# Altium PCB 3.PcbDoc (part 1 of 2)
Units mm, origin at the board's own origin, x right, y up, seen from the top; angles counter-clockwise.
Board outline 213.29 x 128.2 mm, 2 copper layers (Top Layer, Bottom Layer); 207 components, 133 nets, 588 pads, 301 vias.
Unrouted connection lines stored in the file: 3.
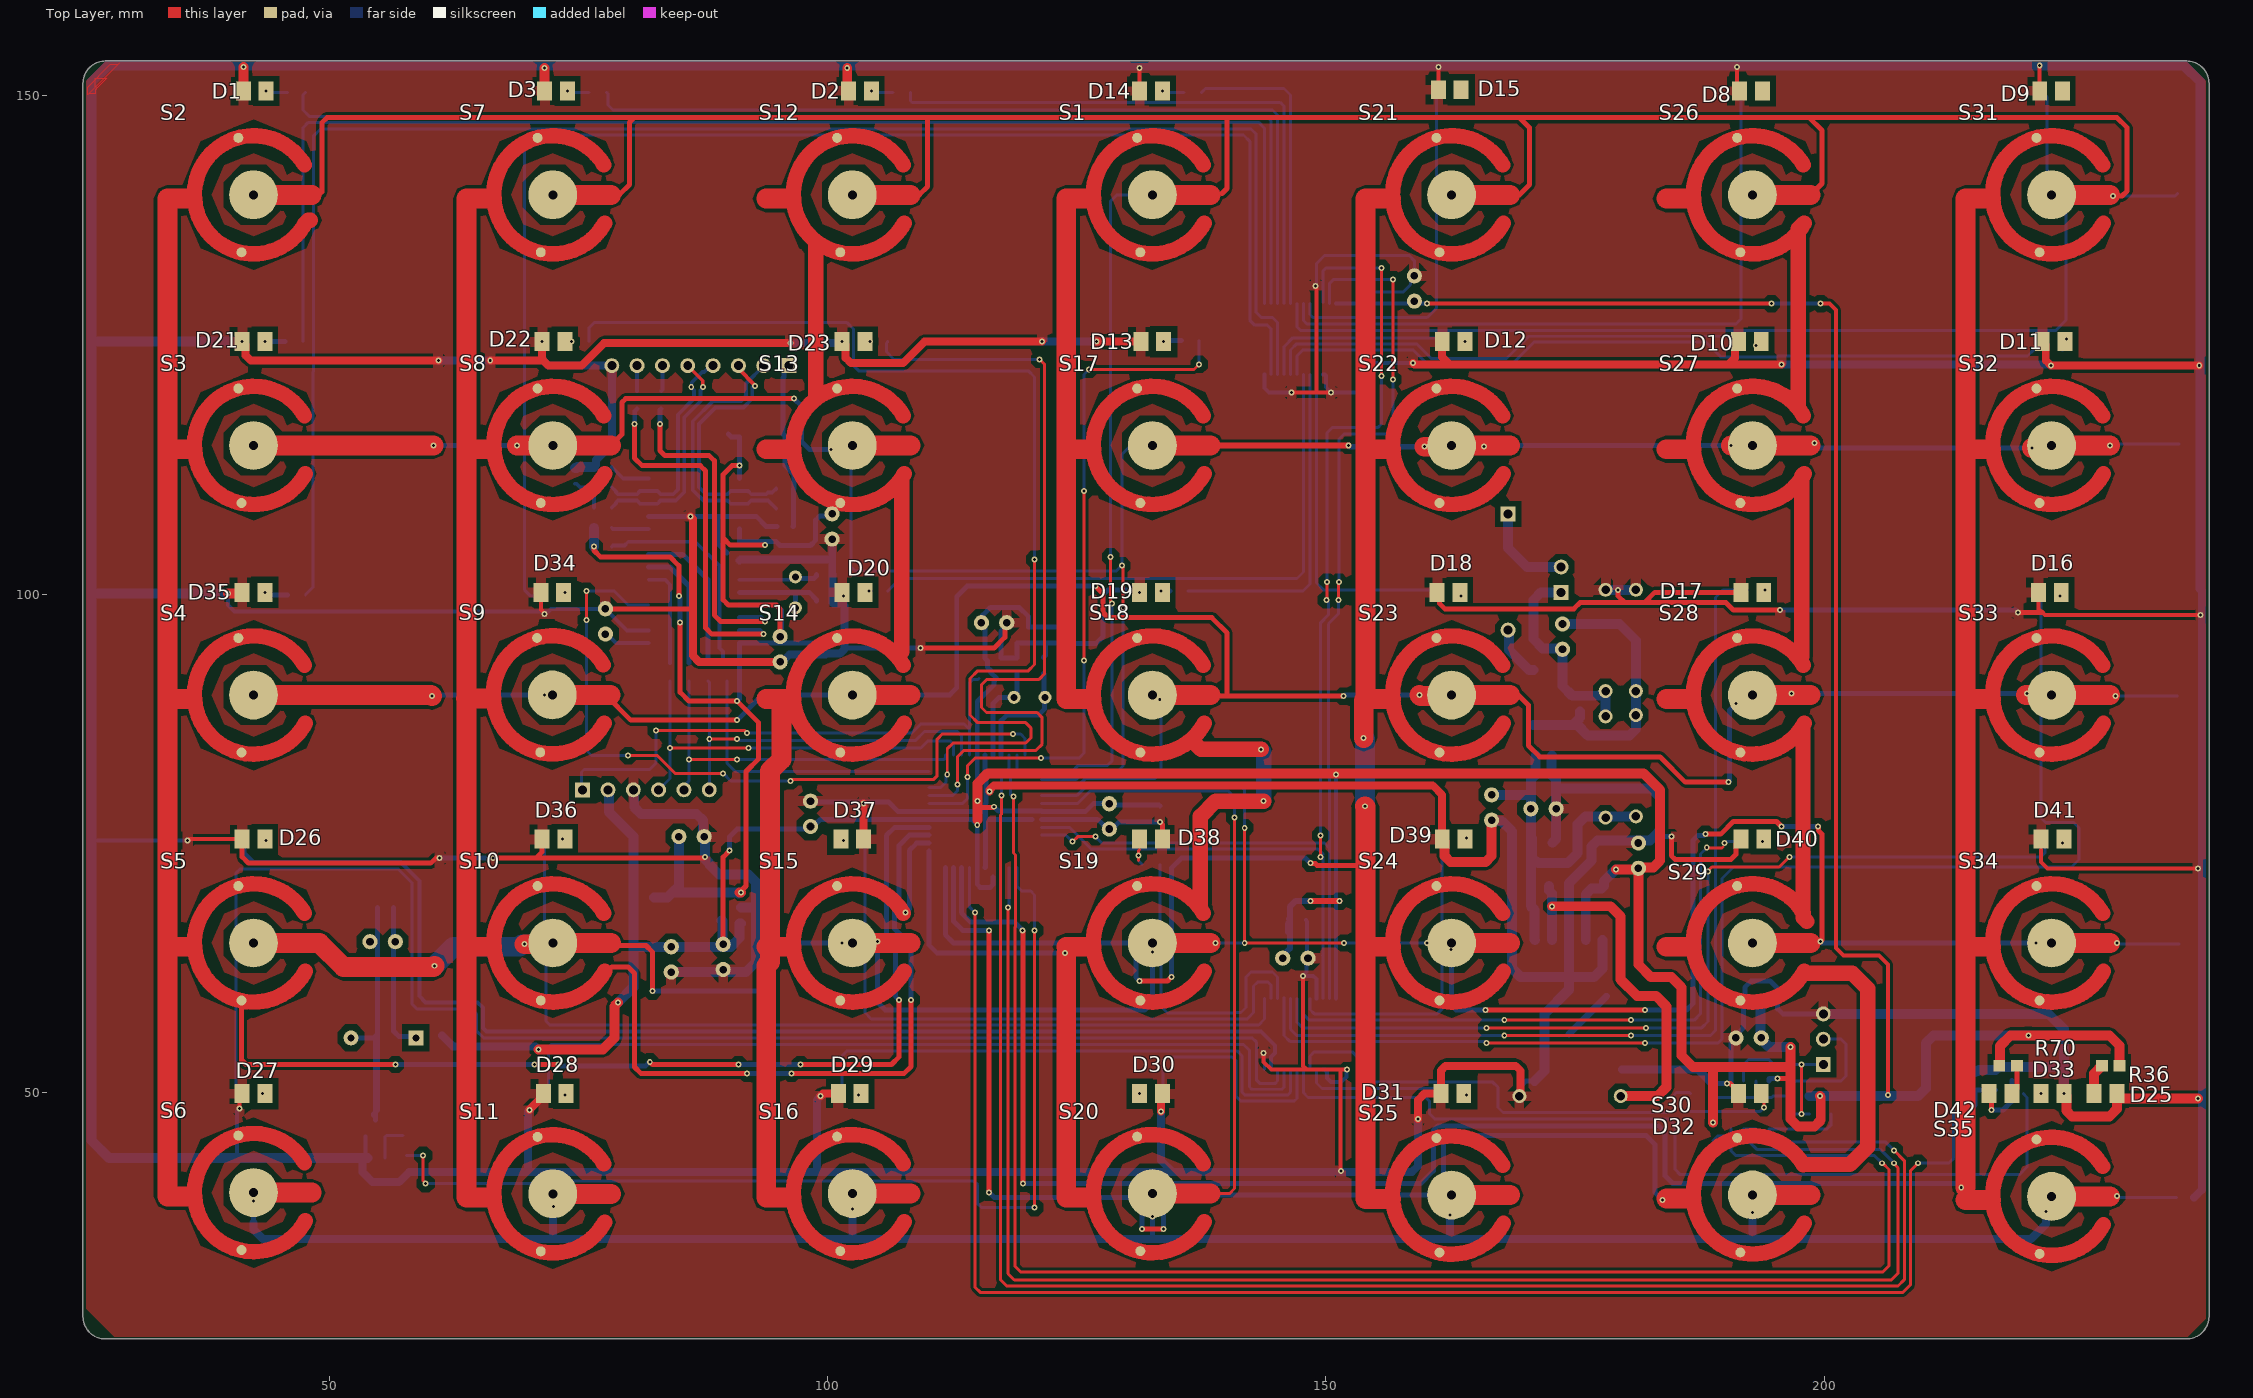
[diagram p0: Top Layer view]
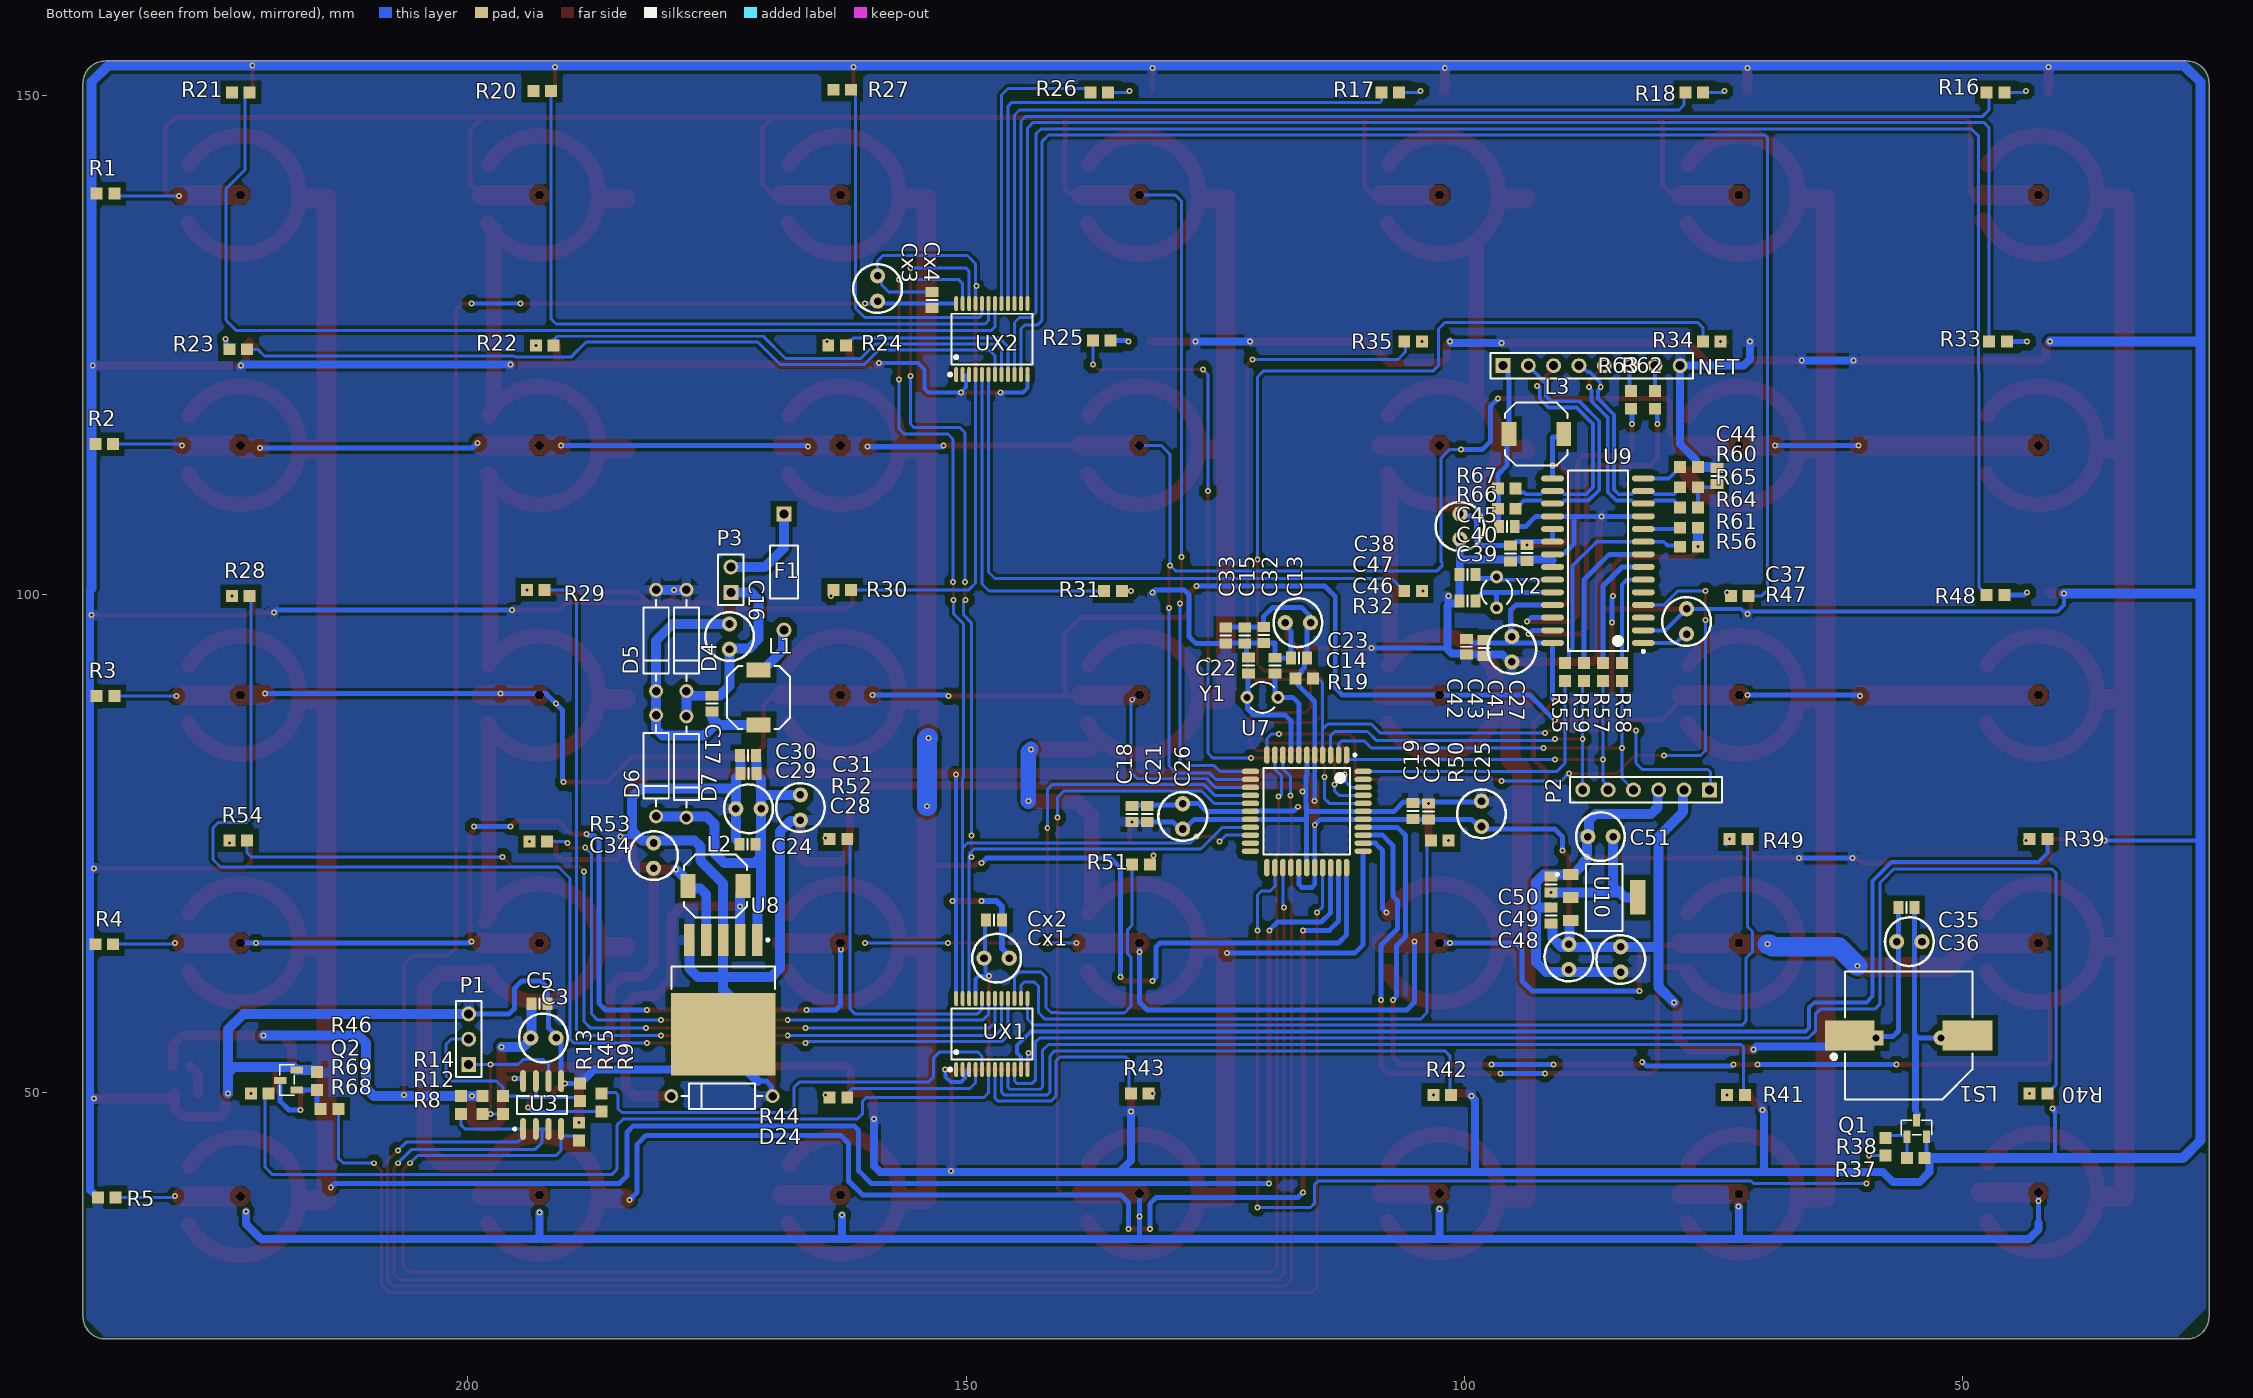
[diagram p1: Bottom Layer view, seen from below]

## Layer stack, top to bottom
Top Solder: solder mask 0.0102, Solder Resist, Dk 3.5
Top Layer: signal copper 0.0356
Dielectric 1: dielectric 0.32, FR-4, Dk 4.8
Bottom Layer: signal copper 0.0356
Bottom Solder: solder mask 0.0102, Solder Resist, Dk 3.5

## Board outline
27.534,25.306 cw(c27.534,27.534) 25.306,27.534 25.306,151.264 cw(c27.552,151.264) 27.552,153.51 236.354,153.51 cw(c236.354,151.264) 238.6,151.264 238.6,27.552 cw(c236.354,27.552) 236.354,25.306

## Design rules (kind name [scope] priority, off if disabled: settings)
Clearance [All] p1: gap=0.6 ignorepadtopadclearanceinfootprint=FALSE except(0: Arc-Hole Track-Hole SMDPad-Hole THPad-Hole Via-Hole Fill-Hole Poly-Hole Region-Hole Text-Hole; 0.1: SMDPad-Text THPad-Text Via-Text Fill-Text Poly-Text Region-Text Text-Text; 0.3: Arc-Arc Arc-Track Arc-SMDPad Arc-THPad Arc-Via Arc-Fill Arc-Poly Arc-Region Arc-Text Track-Track Track-SMDPad Track-THPad Track-Via Track-Fill Track-Poly Track-Region Track-Text)
ComponentClearance [All] p1: gap=0 collisioncheckmode=3 verticalgap=0 showdistances=FALSE
DiffPairsRouting [All] p1: maxlimit=0.254 minlimit=0.254 mostfreqgap=0.254 toplayer_minwidth=0.381 toplayer_maxwidth=0.381 toplayer_prefwidth=0.381 bottomlayer_minwidth=0.381 bottomlayer_maxwidth=0.381 bottomlayer_prefwidth=0.381 maxuncoupledlength=12.7
PlaneClearance [All] p1: clearance=0.1
PlaneConnect [All] p1: planeconnectstyle=Relief reliefexpansion=0.508 reliefentries=4 reliefconductorwidth=0.5 reliefairgap=0.5
PolygonConnect [All] p1: connectstyle=Relief reliefconductorwidth=1 reliefentries=4 polygonreliefangle="90 Angle" airgapwidth=0.5
RoutingVias [All] p1: holewidth=0.3 width=0.6 viastyle="Through Hole" minholewidth=0.3 minwidth=0.6 maxholewidth=0.3 maxwidth=0.6
SolderMaskExpansion [All] p1: expansion=0.102 istentingtop=FALSE
Width [All] p1: maxlimit=10 minlimit=0.254 preferedwidth=0.254 minimp=50.000000 maximp=50.000000 favimp=50.000000
26 further rules are at their usual default settings.

## Classes and differential pairs
component class pic: C3 C5 C13 C14 C15 C16 C17 C18 C19 C20 C21 C22 C23 C24 C25 C26 C27 C28 C29 C30 C31 C32 C33 C34 C35 C36 Cx1 Cx2 Cx3 Cx4 D1 D2 D3 D4 D5 D6 D7 D8 D9 D10 D11 D12 D13 D14 D15 D16 D17 D18 D19 D20 D21 D22 D23 D24 D25 D26 D27 D28 D29 D30 D31 D32 D33 D34 D35 D36 D37 D38 D39 D40 D41 F1 L1 L2 LS1 P1 P2 P3 Q1 R1 R2 R3 R4 R5 R8 R9 R12 R13 R14 R16 R17 R18 R19 R20 R21 R22 R23 R24 R25 R26 R27 R28 R29 R30 R31 R32 R33 R34 R35 R36 R37 R38 R39 R40 R41 R42 R43 R44 R45 R46 R47 R48 R49 R50 R51 R52 R53 R54 S1 S2 S3 S4 S5 S6 S7 S8 S9 S10 S11 S12 S13 S14 S15 S16 S17 S18 S19 S20 S21 S22 S23 S24 S25 S26 S27 S28 S29 S30 S31 S32 S33 S34 S35 U3 U7 U8 UX1 UX2 Y1
component class ENC28J60: C37 C38 C39 C40 C41 C42 C43 C44 C45 C46 C47 C48 C49 C50 C51 D42 L3 NET Q2 R55 R56 R57 R58 R59 R60 R61 R62 R63 R64 R65 R66 R67 R68 R69 R70 U9 U10 Y2
differential pair TPO: +TPO_P -TPO_N
differential pair TPI: +TPI_P -TPI_N

## Components (designator, comment, footprint, x,y, rotation, side; value= is the part's Value field where it differs from the comment)
C3 "Cap Pol2" cap_ele 193.675,55.499 r180 bottom value=10uF
C5 "Cap" 6-0805_L 192.786,58.928 r180 bottom value=0.1uF
C13 "Cap Pol2" cap_ele 115.443,97.155 r0 bottom value=10uF
C14 "Cap" 6-0805_L 116.586,93.599 r180 bottom value=0.1uF
C15 "Cap" 6-0805_L 122.047,95.885 r90 bottom value=0.1uF
C16 "Cap Pol2" cap_ele 173.736,97.028 r270 bottom value=10uF
C17 "Cap" 6-0805_L 175.514,89.027 r90 bottom value=0.1uF
C18 "Cap" 6-0805_L 133.35,77.978 r90 bottom value=0.1uF
C19 "Cap" 6-0805_L 105.156,78.27 r270 bottom value=0.1uF
C20 "Cap" 6-0805_L 103.632,78.232 r270 bottom value=0.1uF
C21 "Cap" 6-0805_L 131.826,77.978 r90 bottom value=0.1uF
C22 "Cap" 6-0805_L 121.666,92.875 r270 bottom value=22pF
C23 "Cap" 6-0805_L 118.999,92.837 r270 bottom value=22pF
C24 "Cap" 6-0805_L 171.92,74.93 r0 bottom value=0.1uF
C25 "Cap Pol2" cap_ele 98.298,76.708 r90 bottom value=10uF
C26 "Cap Pol2" cap_ele 128.27,78.994 r270 bottom value=10uF
C27 "Cap Pol2" cap_ele 84.328,64.643 r270 bottom value=10uF
C28 "Cap Pol2" cap_ele 166.624,79.883 r270 bottom value=10uF
C29 "Cap" 6-0805_L 171.831,82.042 r0 bottom value=0.1uF
C30 "Cap" 6-0805_L 171.869,83.82 r0 bottom value=0.1uF
C31 "Cap Pol2" cap_ele 170.561,78.486 r0 bottom value=10uF
C32 "Cap" 6-0805_L 120.142,95.923 r270 bottom value=0.1uF
C33 "Cap" 6-0805_L 123.952,95.885 r270 bottom value=0.1uF
C34 "Cap Pol2" cap_ele 181.356,72.517 r90 bottom value=10uF
C35 "Cap" 6-0805_L 55.664,68.58 r180 bottom value=0.1uF
C36 "Cap Pol2" cap_ele 56.642,65.151 r180 bottom value=10uF
C37 "Cap Pol2" cap_ele 77.724,96.012 r90 bottom value=10uF
C38 "Cap Pol2" cap_ele 100.457,108.077 r270 bottom value=10uF
C39 "Cap" 6-0805_L 95.377,104.102 r90 bottom value=0.1uF
C40 "Cap" 6-0805_L 93.726,104.14 r90 bottom value=0.1uF
C41 "Cap" 6-0805_L 98.044,94.615 r90 bottom value=0.1uF
C42 "Cap Pol2" cap_ele 95.25,95.758 r270 bottom value=10uF
C43 "Cap" 6-0805_L 99.822,94.742 r90 bottom value=0.1uF
C44 "Cap" 6-0805_L 74.676,111.887 r270 bottom value=100nF
C45 "Cap" 6-0805_L 95.758,106.807 r0 bottom value=100nF
C46 "Cap" 6-0805_L 99.695,101.981 r180 bottom value=18pF
C47 "Cap" 6-0805_L 99.695,99.314 r180 bottom value=18pF
C48 "Cap Pol2" cap_ele 89.535,64.897 r270 bottom value=10uF
C49 "Cap" 6-0805_L 91.313,67.78 r90 bottom value=0.1uF
C50 "Cap" 6-0805_L 91.313,70.904 r90 bottom value=0.1uF
C51 "Cap Pol2" cap_ele 85.09,75.692 r0 bottom value=10uF
Cx1 "Cap Pol2" cap_ele 145.669,63.5 r0 bottom value=10uF
Cx2 "Cap" 6-0805_L 147.193,67.31 r180 bottom value=0.1uF
Cx3 "Cap Pol2" cap_ele 158.877,129.413 r90 bottom value=10uF
Cx4 "Cap" 6-0805_L 153.416,129.54 r270 bottom value=0.1uF
D1 "LED0" led 42.545,150.495 r180 top
D2 "LED0" led 103.251,150.495 r180 top
D3 "LED0" led 72.771,150.495 r180 top
D4 "Diode" DIODE-0.4 178.054,95.377 r270 bottom
D5 "Diode" DIODE-0.4 181.102,95.377 r270 bottom
D6 "Diode" DIODE-0.4 181.102,82.804 r270 bottom
D7 "Diode" DIODE-0.4 178.054,82.677 r270 bottom
D8 "LED0" LED 192.659,150.495 r180 top
D9 "LED0" led 222.758,150.495 r180 top
D10 "LED0" led 192.532,125.349 r180 top
D11 "LED0" led 223.012,125.349 r180 top
D12 "LED0" led 162.814,125.349 r180 top
D13 "LED0" led 132.588,125.349 r180 top
D14 "LED0" led 132.461,150.495 r180 top
D15 "LED0" led 162.433,150.622 r180 top
D16 "LED0" led 222.631,100.203 r180 top
D17 "LED0" led 192.786,100.203 r180 top
D18 "LED0" led 162.306,100.203 r180 top
D19 "LED0" led 132.461,100.203 r180 top
D20 "LED0" led 102.616,100.203 r180 top
D21 "LED0" led 42.418,125.349 r180 top
D22 "LED0" led 72.517,125.349 r180 top
D23 "LED0" led 102.616,125.349 r180 top
D24 "Diode" DIODE-0.4 174.498,49.657 r0 bottom
D25 "LED0" led 228.219,49.911 r0 top
D26 "LED0" led 42.418,75.438 r0 top
D27 "LED0" led 42.418,49.911 r0 top
D28 "LED0" led 72.644,49.911 r0 top
D29 "LED0" led 102.235,49.911 r0 top
D30 "LED0" led 132.461,49.911 r180 top
D31 "LED0" led 162.687,49.911 r0 top
D32 "LED0" led 192.532,49.911 r0 top
D33 "LED0" led 222.885,49.911 r180 top
D34 "LED0" led 72.39,100.203 r0 top
D35 "LED0" led 42.418,100.203 r0 top
D36 "LED0" led 72.517,75.438 r0 top
D37 "LED0" led 102.489,75.438 r180 top
D38 "LED0" led 132.461,75.438 r180 top
D39 "LED0" led 162.814,75.438 r0 top
D40 "LED0" led 192.786,75.438 r0 top
D41 "LED0" led 222.885,75.438 r0 top
D42 "LED0" led 217.678,49.911 r180 top
F1 "Fuse 1" PIN-W2/E2.8 168.275,102.235 r270 bottom
L1 "B82462G4224M000" B82462G4 170.815,89.662 r270 bottom value=470uH
L2 "B82462G4224M000" B82462G4 175.133,70.739 r0 bottom value=470uH
L3 "B82462G4224M000" B82462G4 92.793,116.078 r180 bottom value=50uH
LS1 "Buzzer" ABSM-1574 61.347,55.739 r180 bottom
NET "Header 8" HDR1X8 96.139,122.936 r180 bottom
P1 "Header 3" HDR1X3 199.898,52.832 r90 bottom
P2 "Header 6" HDR1X6 75.438,80.391 r0 bottom
P3 "Header 2" HDR1X2 173.609,100.203 r90 bottom
Q1 "NPN" NPN(SOP) 54.737,46.387 r180 bottom
Q2 "NPN" NPN(SOP) 217.964,51.181 r90 bottom
R1 "Res1" res 236.347,140.208 r180 bottom value=1K
R2 "Res1" res 236.474,115.062 r180 bottom value=1K
R3 "Res1" res 236.347,89.789 r180 bottom value=1K
R4 "Res1" res 236.474,64.897 r180 bottom value=1K
R5 "Res1" res 236.22,39.497 r180 bottom value=1K
R8 "Res1" res 200.66,48.768 r90 bottom value=10K
R9 "Res1" res 188.849,46.101 r270 bottom value=10K
R12 "Res1" res 198.501,48.768 r90 bottom value=10K
R13 "Res1" res 188.722,50.038 r270 bottom value=10K
R14 "Res1" res 196.469,48.768 r270 bottom value=270
R16 "Res1" res 46.736,150.368 r180 bottom value=1K
R17 "Res1" res 107.442,150.368 r180 bottom value=1K
R18 "Res1" res 76.962,150.368 r180 bottom value=1K
R19 "Res1" res 116.078,91.567 r180 bottom value=1K
R20 "Res1" res 192.532,150.495 r0 bottom value=1K
R21 "Res1" res 222.758,150.368 r0 bottom value=1K
R22 "Res1" res 192.278,124.968 r0 bottom value=1K
R23 "Res1" res 223.012,124.587 r0 bottom value=1K
R24 "Res1" res 162.941,124.968 r0 bottom value=1K
R25 "Res1" res 136.398,125.476 r180 bottom value=1K
R26 "Res1" res 136.652,150.368 r180 bottom value=1K
R27 "Res1" res 162.433,150.622 r0 bottom value=1K
R28 "Res1" res 222.758,99.822 r0 bottom value=1K
R29 "Res1" res 193.167,100.457 r0 bottom value=1K
R30 "Res1" res 162.433,100.457 r0 bottom value=1K
R31 "Res1" res 135.255,100.33 r180 bottom value=1K
R32 "Res1" res 105.156,100.33 r180 bottom value=1K
R33 "Res1" res 46.482,125.349 r180 bottom value=1K
R34 "Res1" res 75.184,125.349 r180 bottom value=1K
R35 "Res1" res 105.156,125.349 r180 bottom value=1K
R36 "Res1" res 228.727,52.705 r180 top value=1K
R37 "Res1" res 57.785,44.577 r90 bottom value=1K
R38 "Res1" res 54.737,43.434 r0 bottom value=1K
R39 "Res1" res 42.418,75.438 r180 bottom value=1K
R40 "Res1" res 42.418,49.911 r180 bottom value=1K
R41 "Res1" res 72.771,49.784 r180 bottom value=1K
R42 "Res1" res 102.235,49.784 r180 bottom value=1K
R43 "Res1" res 132.588,49.911 r0 bottom value=1K
R44 "Res1" res 162.814,49.53 r180 bottom value=1K
R45 "Res1" res 186.563,49.022 r90 bottom value=1K
R46 "Res1" res 220.853,49.911 r180 bottom value=1K
R47 "Res1" res 72.39,99.822 r180 bottom value=1K
R48 "Res1" res 46.736,99.949 r0 bottom value=1K
R49 "Res1" res 72.517,75.438 r180 bottom value=1K
R50 "Res1" res 102.489,75.311 r0 bottom value=1K
R51 "Res1" res 132.461,72.898 r0 bottom value=1K
R52 "Res1" res 162.814,75.438 r180 bottom value=1K
R53 "Res1" res 192.913,75.184 r180 bottom value=1K
R54 "Res1" res 223.012,75.311 r180 bottom value=1K
R55 "Res1" res 89.916,92.202 r270 bottom value=1K
R56 "Res1" res 77.47,104.775 r180 bottom value=1K
R57 "Res1" res 86.106,92.202 r270 bottom value=1K
R58 "Res1" res 84.201,92.202 r270 bottom value=1K
R59 "Res1" res 88.011,92.202 r270 bottom value=1K
R60 "Res1" res 77.47,112.776 r180 bottom value=1K
R61 "Res1" res 77.47,106.68 r180 bottom value=1K
R62 "Res1" res 80.899,119.507 r270 bottom value=1K
R63 "Res1" res 83.312,119.507 r270 bottom value=1K
R64 "Res1" res 77.47,108.712 r0 bottom value=50
R65 "Res1" res 77.47,110.744 r0 bottom value=1K
R66 "Res1" res 95.758,110.617 r180 bottom value=1K
R67 "Res1" res 95.758,108.585 r180 bottom value=1K
R68 "Res1" res 213.868,48.387 r0 bottom value=1K
R69 "Res1" res 215.138,51.181 r270 bottom value=1K
R70 "Res1" res 218.44,52.705 r180 top value=1K
S1 "SW-PB" button#1 132.665,140.227 r180 top
S2 "SW-PB" button#2 42.495,140.227 r180 top
S3 "SW-PB" button#1 42.495,115.081 r180 top
S4 "SW-PB" button#3 42.495,90.043 r180 top
S5 "SW-PB" button#4 42.495,65.17 r180 top
S6 "SW-PB" button#1 42.495,40.132 r180 top
S7 "SW-PB" button#1 72.517,140.227 r180 top
S8 "SW-PB" button#5 72.517,115.081 r180 top
S9 "SW-PB" button#6 72.467,90.062 r180 top
S10 "SW-PB" button#1 72.517,65.17 r180 top
S11 "SW-PB" button#7 72.517,40.005 r180 top
S12 "SW-PB" button#8 102.566,140.227 r180 top
S13 "SW-PB" button#9 102.566,115.081 r180 top
S14 "SW-PB" button#10 102.566,90.043 r180 top
S15 "SW-PB" button#11 102.566,65.17 r180 top
S16 "SW-PB" button#1 102.566,40.024 r180 top
S17 "SW-PB" button#1 132.665,115.081 r180 top
S18 "SW-PB" button#7 132.665,90.043 r180 top
S19 "SW-PB" button#1 132.665,65.17 r180 top
S20 "SW-PB" button#2 132.665,40.024 r180 top
S21 "SW-PB" button#1 162.687,140.227 r180 top
S22 "SW-PB" button#12 162.687,115.081 r180 top
S23 "SW-PB" button#1 162.687,90.043 r180 top
S24 "SW-PB" button#1 162.687,65.17 r180 top
S25 "SW-PB" button#7 162.687,39.878 r180 top
S26 "SW-PB" button#7 192.863,140.227 r180 top
S27 "SW-PB" button#8 192.863,115.081 r180 top
S28 "SW-PB" button#13 192.863,90.043 r180 top
S29 "SW-PB" button#7 192.863,65.17 r180 top
S30 "SW-PB" button#1 192.863,39.897 r180 top
S31 "SW-PB" button#1 222.885,140.227 r180 top
S32 "SW-PB" button#1 222.885,115.081 r180 top
S33 "SW-PB" button#1 222.885,90.043 r180 top
S34 "SW-PB" button#1 222.885,65.17 r180 top
S35 "SW-PB" button#1 222.885,39.751 r180 top
U3 "MAX485CSA" NSO8_N 192.532,48.768 r90 bottom
U7 "ATmega16-16AC" 44A_N 115.824,78.232 r270 bottom
U8 "LM2596S-5.0" TS5B_N 174.371,59.33 r270 bottom
U9 "ENC28J60/SO" SOIC-SO28_N 86.614,103.378 r0 bottom
U10 "REG1117-3.3" ZZ311 85.979,69.596 r270 bottom
UX1 "PCF8575" PCF8575 604.468,398.539 r180 bottom
UX2 "PCF8575" PCF8575 604.468,468.262 r180 bottom
Y1 "16MHz" R38 120.269,89.662 r90 bottom
Y2 "XTAL" R38 96.774,100.203 r0 bottom

## Footprints (in the part's own frame and the unit in brackets; to place one, negate y for a bottom-side part, rotate by r counter-clockwise, add the part's x,y. Pads: shape width x height; smd on the part's side, far side on the other; paste and mask are expansions set on the pad)
6-0805_L [mm] "Chip Resistor, Body 2.0x1.2mm, IPC High Density"
  rect 1x1.3 smd: 1(-0.8,0) 2(0.8,0)
  silkscreen extent 0,-0.55 0,0.55, body extent -1.07,-0.7 1.07,0.7, height 0.7
44A_N [mm] "Thin QFP, 44-Leads, Body 10x10mm, Pitch 0.8mm, IPC Medium Density"
  oval 1.75x0.55 smd: 1(-5.65,4) 2(-5.65,3.2) 3(-5.65,2.4) 4(-5.65,1.6) 5(-5.65,0.8) 6(-5.65,0) 7(-5.65,-0.8) 8(-5.65,-1.6) 9(-5.65,-2.4) 10(-5.65,-3.2) 11(-5.65,-4) 23(5.65,-4) 24(5.65,-3.2) 25(5.65,-2.4) 26(5.65,-1.6) 27(5.65,-0.8) 28(5.65,0) 29(5.65,0.8) 30(5.65,1.6) 31(5.65,2.4) 32(5.65,3.2) 33(5.65,4)
  oval 0.55x1.75 smd: 12(-4,-5.65) 13(-3.2,-5.65) 14(-2.4,-5.65) 15(-1.6,-5.65) 16(-0.8,-5.65) 17(0,-5.65) 18(0.8,-5.65) 19(1.6,-5.65) 20(2.4,-5.65) 21(3.2,-5.65) 22(4,-5.65) 34(4,5.65) 35(3.2,5.65) 36(2.4,5.65) 37(1.6,5.65) 38(0.8,5.65) 39(0,5.65) 40(-0.8,5.65) 41(-1.6,5.65) 42(-2.4,5.65) 43(-3.2,5.65) 44(-4,5.65)
  silkscreen extent -5.77,-4.35 4.35,4.95, body extent -5,-5 5,5, height 1.2
ABSM-1574 [mm] "Magnetic Transducer Buzzer"
  rect 5x3 smd: 1(0,0) 2(11.8,0)
  rect 1.5x1.5 hole 0.7: 1A(2.65,-0.24)
  round 1.5 hole 0.7: 2A(9.15,-0.24)
  silkscreen extent -1.83,-6.4 12.3,6.4
B82462G4 [mm] "SM Inductor; 2 Leads; Body 6.3x6.3mm (LxW)"
  rect 1.5x2.4 smd: 1(-2.75,0) 2(2.75,0)
  silkscreen extent -3.15,-3.15 3.15,3.15, body extent -3.15,-3.15 3.15,3.15, height 3
button#1 [mm]
  round 4.9 smd: 1(0.077,0.146)
  round 1 smd: 2(1.283,5.914) 2(1.601,-5.569)
  Top Layer lines w1.545: -5.038,-2.848 ccw(c0.077,0.146) -5.126,2.984
  Top Layer lines w2: 8.713,0.527 6.173,0.527 ; 0.077,0.146 -5.765,0.146
button#2 [mm]
  round 4.9 smd: 1(0.077,0.146)
  round 1 smd: 2(1.283,5.914) 2(1.601,-5.569)
  Top Layer lines w1.545: -5.038,-2.848 ccw(c0.077,0.146) -5.126,2.984
  Top Layer lines w2: 8.713,0.527 6.173,0.527 ; 0.077,0.146 -4.114,0.146 -5.765,0.146
button#3 [mm]
  round 4.9 smd: 1(0.077,0.146)
  round 1 smd: 2(1.283,5.914) 2(1.601,-5.569)
  Top Layer lines w1.545: -5.038,-2.848 ccw(c0.077,0.146) -5.126,2.984
  Top Layer lines w2: 8.713,0.527 6.173,0.527 ; 0.077,0.146 -0.812,0.146 -3.098,0.146 -5.765,0.146
button#4 [mm]
  round 4.9 smd: 1(0.077,0.146)
  round 1 smd: 2(1.283,5.914) 2(1.601,-5.569)
  Top Layer lines w1.545: -5.038,-2.848 ccw(c0.077,0.146) 1.239,5.958 ccw(c0.077,0.146) -5.126,2.984
  Top Layer lines w2: 8.713,0.527 6.173,0.527 ; 0.077,0.146 -4.368,0.146 -5.765,0.146
button#5 [mm]
  round 4.9 smd: 1(0.077,0.146)
  round 1 smd: 2(1.283,5.914) 2(1.601,-5.569)
  Top Layer lines w1.545: -5.038,-2.848 ccw(c0.077,0.146) -5.126,2.984
  Top Layer lines w2: 8.713,0.527 6.173,0.527 ; 0.077,0.146 -3.175,0.146 -4.699,0.146 -5.765,0.146
button#6 [mm]
  round 4.9 smd: 1(0.077,0.146)
  round 1 smd: 2(1.283,5.914) 2(1.601,-5.569)
  Top Layer lines w1.545: -5.038,-2.848 ccw(c0.077,0.146) -5.126,2.984
  Top Layer lines w2: 8.713,0.527 8.663,0.527 6.173,0.527 ; 0.077,0.146 -4.699,0.146 -5.257,0.146 -5.765,0.146
button#7 [mm]
  round 4.9 smd: 1(0.077,0.146)
  round 1 smd: 2(1.283,5.914) 2(1.601,-5.569)
  Top Layer lines w1.545: -5.038,-2.848 ccw(c0.077,0.146) -5.126,2.984
  Top Layer lines w2: 8.713,0.527 6.173,0.527 ; 0.077,0.146 0,0.146 -5.765,0.146
button#8 [mm]
  round 4.9 smd: 1(0.077,0.146)
  round 1 smd: 2(1.283,5.914) 2(1.601,-5.569)
  Top Layer lines w1.545: -5.038,-2.848 ccw(c0.077,0.146) 4.405,4.195 ccw(c0.077,0.146) 4.126,4.475 ccw(c0.077,0.146) -5.126,2.984
  Top Layer lines w2: 8.713,0.527 6.173,0.527 ; 0.077,0.146 -5.765,0.146
button#9 [mm]
  round 4.9 smd: 1(0.077,0.146)
  round 1 smd: 2(1.283,5.914) 2(1.601,-5.569)
  Top Layer lines w1.545: -5.038,-2.848 ccw(c0.077,0.146) 4.057,4.538 ccw(c0.077,0.146) -4.567,3.829 ccw(c0.077,0.146) -4.716,3.632 ccw(c0.077,0.146) -5.126,2.984
  Top Layer lines w2: 8.713,0.527 6.173,0.527 ; 0.077,0.146 -5.765,0.146
button#10 [mm]
  round 4.9 smd: 1(0.077,0.146)
  round 1 smd: 2(1.283,5.914) 2(1.601,-5.569)
  Top Layer lines w1.545: -5.038,-2.848 ccw(c0.077,0.146) -5.126,2.984
  Top Layer lines w2: 8.713,0.527 7.189,0.527 6.173,0.527 ; 0.077,0.146 -4.622,0.146 -5.765,0.146
button#11 [mm]
  round 4.9 smd: 1(0.077,0.146)
  round 1 smd: 2(1.283,5.914) 2(1.601,-5.569)
  Top Layer lines w1.545: -5.038,-2.848 ccw(c0.077,0.146) -5.126,2.984
  Top Layer lines w2: 8.713,0.527 8.332,0.527 6.173,0.527 ; 0.077,0.146 -2.463,0.146 -5.765,0.146
button#12 [mm]
  round 4.9 smd: 1(0.077,0.146)
  round 1 smd: 2(1.283,5.914) 2(1.601,-5.569)
  Top Layer lines w1.545: -5.038,-2.848 ccw(c0.077,0.146) -5.126,2.984
  Top Layer lines w2: 8.713,0.527 6.173,0.527 ; 0.077,0.146 -3.175,0.146 -5.765,0.146
button#13 [mm]
  round 4.9 smd: 1(0.077,0.146)
  round 1 smd: 2(1.283,5.914) 2(1.601,-5.569)
  Top Layer lines w1.545: -5.038,-2.848 ccw(c0.077,0.146) -5.126,2.984
  Top Layer lines w2: 8.713,0.527 6.173,0.527 ; 0.077,0.146 -1.193,0.146 -5.765,0.146
cap_ele [mil]
  round 60 hole 30: 1(0,0) 2(100,0)
  silkscreen extent -46,-96 146,96
DIODE-0.4 [mm] "Diode, Thru-Hole; 2 Leads; 0.4 in Pin Spacing"
  round 1.4 hole 0.85: 1(-5.08,0) 2(5.08,0)
  silkscreen extent -4.06,-1.27 4.06,1.27
HDR1X2 [mm] "Connector; Header; 2 Position"
  rect 1.5x1.5 hole 0.9: 1(0,0)
  round 1.5 hole 0.9: 2(2.54,0)
  silkscreen extent -1.27,-1.27 3.81,1.27
HDR1X3 [mm] "Connector; Header; 3 Position"
  rect 1.5x1.5 hole 0.9: 1(0,0)
  round 1.5 hole 0.9: 2(2.54,0) 3(5.08,0)
  silkscreen extent -1.27,-1.27 6.35,1.27
HDR1X6 [mm] "Connector; Header; 6 Position"
  rect 1.5x1.5 hole 0.9: 1(0,0)
  round 1.5 hole 0.9: 2(2.54,0) 3(5.08,0) 4(7.62,0) 5(10.16,0) 6(12.7,0)
  silkscreen extent -1.27,-1.27 13.97,1.27
HDR1X8 [mm] "Connector; Header; 8 Position"
  rect 1.5x1.5 hole 0.9: 1(0,0)
  round 1.5 hole 0.9: 2(2.54,0) 3(5.08,0) 4(7.62,0) 5(10.16,0) 6(12.7,0) 7(15.24,0) 8(17.78,0)
  silkscreen extent -1.27,-1.27 19.05,1.27
led [mm]
  rect 1.5x1.9 smd: 1(-1.143,0) 2(1.143,0)
LED [mm]
  rect 1.5x1.9 smd: 1(-1.143,0) 2(1.143,0)
NPN(SOP) [mm]
  rect 0.7x1.25 smd: 1(0.07,0.855) 2(-0.889,-0.794) 3(1.077,-0.794)
  silkscreen extent -1.45,-0.58 1.6,0.87
NSO8_N [mm] "SOIC, 8-Leads, Body 4.9x3.9mm, Pitch 1.27mm, IPC Medium Density"
  oval 2.2x0.6 smd: 1(-2.4,1.905) 2(-2.4,0.635) 3(-2.4,-0.635) 4(-2.4,-1.905) 5(2.4,-1.905) 6(2.4,-0.635) 7(2.4,0.635) 8(2.4,1.905)
  silkscreen extent -2.52,-2.5 0.9,2.88, body extent -2,-2.5 2,2.5, height 1.75
PCF8575 [mm]
  oval 0.4x1.5 smd: 1(453.472,-346.215) 2(454.122,-346.215) 3(454.772,-346.215) 4(455.422,-346.215) 5(456.072,-346.215) 6(456.722,-346.215) 7(457.372,-346.215) 8(458.022,-346.215) 9(458.672,-346.215) 10(459.322,-346.215) 11(459.972,-346.215) 12(460.622,-346.215) 13(460.622,-339.091) 14(459.972,-339.091) 15(459.322,-339.091) 16(458.672,-339.091) 17(458.022,-339.091) 18(457.372,-339.091) 19(456.722,-339.091) 20(456.072,-339.091) 21(455.422,-339.091) 22(454.772,-339.091) 23(454.122,-339.091) 24(453.472,-339.091)
  silkscreen extent 452.72,-346.36 461.11,-340.11
PIN-W2/E2.8 [mm] "Thru-Hole; 2 Leads"
  rect 1.5x1.5 hole 0.9: 1(-5.825,0)
  round 1.5 hole 0.9: 2(5.825,0)
  silkscreen extent -2.65,-1.4 2.65,1.4
R38 [mm] "Crystal, Thru-Hole; 2 Leads; Body 3.1 x 8.2 mm (Dia.xH)"
  round 1.3 hole 0.7: 1(0,1.55) 2(0,-1.55)
  silkscreen extent -1.55,-1.19 1.55,1.17
res [mm]
  rect 1.2x1.2 smd: 1(-0.889,0) 2(0.889,0)
SOIC-SO28_N [mm] "SOIC, 28-Leads, Body 17.9x7.5mm, Pitch 1.27mm, IPC Medium Density"
  oval 2.3x0.6 smd: 1(-4.55,8.255) 2(-4.55,6.985) 3(-4.55,5.715) 4(-4.55,4.445) 5(-4.55,3.175) 6(-4.55,1.905) 7(-4.55,0.635) 8(-4.55,-0.635) 9(-4.55,-1.905) 10(-4.55,-3.175) 11(-4.55,-4.445) 12(-4.55,-5.715) 13(-4.55,-6.985) 14(-4.55,-8.255) 15(4.55,-8.255) 16(4.55,-6.985) 17(4.55,-5.715) 18(4.55,-4.445) 19(4.55,-3.175) 20(4.55,-1.905) 21(4.55,-0.635) 22(4.55,0.635) 23(4.55,1.905) 24(4.55,3.175) 25(4.55,4.445) 26(4.55,5.715) 27(4.55,6.985) 28(4.55,8.255)
  silkscreen extent -4.67,-9.05 3,9.23, body extent -3.8,-9.06 3.8,9.06, height 2.65
TS5B_N [mm] "D2-PAK, 6-Leads, Body 8.6x10.2mm, Pitch 1.7mm, Lead Span 14.1mm, IPC Medium Density"
  rect 3.2x1.05 smd: 1(-6,3.4) 2(-6,1.7) 3(-6,0) 4(-6,-1.7) 5(-6,-3.4)
  rect 8.3x10.45 smd: 6(3.45,0)
  silkscreen extent -6.12,-5.2 -1.1,5.2, body extent -3.35,-5.2 6.05,5.2, height 4.65
ZZ311 [mm] "SOT-223/SC-73; 4 Leads; Body 6.7 x 7.3 mm, inc. leads (LxW max)"
  rect 1.1x1.55 smd: 1(-2.3,-3.375) 2(0,-3.375) 3(2.3,-3.375)
  rect 3.45x1.55 smd: 4(0,3.375)
  silkscreen extent -3.35,-4.83 3.35,1.85

## Part data
C3 C13 C16 C25 C26 C27 C28 C31 C34 C36 C37 C38 C42 C48 C51 Cx1 Cx3: "Polarized Capacitor (Axial)", LatestRevisionDate=17-Jul-2002, LatestRevisionNote="Re-released for DXP Platform.", PackageDescription="Polarized Capacitor; 2 Leads", PackageReference=POLAR0.8, Published=8-Jun-2000, Publisher="Altium Limited"
C5 C14 C15 C17 C18 C19 C20 C21 C22 C23 C24 C29 C30 C32 C33 C35 C39 C40 C41 C43 C44 C45 C46 C47 C49 C50 Cx2 Cx4: "Capacitor", LatestRevisionDate=17-Jul-2002, LatestRevisionNote="Re-released for DXP Platform.", PackageDescription="Radial Cap, Thru-Hole; 2 Leads; 0.3 in Pin Spacing", PackageReference=RAD-0.3, Published=8-Jun-2000, Publisher="Altium Limited"
D1 D2 D3 D8 D9 D10 D11 D12 D13 D14 D15 D16 D17 D18 D19 D20 D21 D22 D23 D25 D26 D27 D28 D29 D30 D31 D32 D33 D34 D35 D36 D37 D38 D39 D40 D41 D42: "Typical INFRARED GaAs LED", LatestRevisionDate=08-Jul-2005, LatestRevisionNote="Mech Layer 1 removed.", PackageDescription="LED; 2 Leads", PackageReference=LED-0, Published=8-Jun-2000, Publisher="Altium Limited"
D4 D5 D6 D7 D24: "Default Diode", Code_JEDEC=DO-214-AB, LatestRevisionDate=17-Jul-2002, LatestRevisionNote="Re-released for DXP Platform.", PackageDescription="DO-214-AB/SMC; 2 C-Bend Leads; Body 7.9 x 5.9 mm, inc. leads (LxW)", PackageReference=SMC, PackageVersion=Sep-1996, Published=8-Jun-2000, Publisher="Altium Limited"
F1: "Fuse", LatestRevisionDate=17-Jul-2002, LatestRevisionNote="Re-released for DXP Platform.", PackageDescription="Thru-Hole; 2 Leads", PackageReference=PIN-W2/E2.8, Published=8-Jun-2000, Publisher="Altium Limited"
L1 L2 L3: "SMT Power Inductor; Size 6.3×6.3×3.0mm, ±20% Tolerance, 220uH, 0.35A", ComponentLink1Description="Manufacturer Link", ComponentLink1URL=http://www.epcos.com/, ComponentLink2Description=Datasheet, ComponentLink2URL=http://www.epcos.com/inf/30/db/ind_2008/b82462g4.pdf, DatasheetVersion=Mar-2008, PackageDescription="SM Power Inductor; 2 Leads; Body 6.3 x 6.3 x 3.0 mm (LxWxH)", PackageReference=B82462G4, PackageVersion=Mar-2008, PCB_Layout="Complies with manufacturer's recommendation.", Published=26-Sep-2008, Publisher="Altium Limited"
LS1: "Magnetic Transducer Buzzer", ComponentLink1Description="Manufacturer Link", ComponentLink1URL=http://www.megastar.com/linecard/buzzmode/index.php, DatasheetVersion=17-Dec-2003, LatestRevisionDate=17-Dec-2003, LatestRevisionNote="Schematic revised, PCB Footprint replaced.", PackageDescription="Magnetic Transducer Buzzer", PackageReference=ABSM-1574, Published=24-Mar-1999, Publisher="Altium Limited"
NET: "Header, 8-Pin", LatestRevisionDate=17-Jul-2002, LatestRevisionNote="Re-released for DXP Platform.", Publisher="Altium Limited"
P1: "Header, 3-Pin", LatestRevisionDate=17-Jul-2002, LatestRevisionNote="Re-released for DXP Platform.", Publisher="Altium Limited"
P2: "Header, 6-Pin", LatestRevisionDate=17-Jul-2002, LatestRevisionNote="Re-released for DXP Platform.", Publisher="Altium Limited"
P3: "Header, 2-Pin", LatestRevisionDate=17-Jul-2002, LatestRevisionNote="Re-released for DXP Platform.", Publisher="Altium Limited"
Q1 Q2: "NPN Bipolar Transistor", Code_JEDEC=TO-226-AA, LatestRevisionDate=17-Jul-2002, LatestRevisionNote="Re-released for DXP Platform.", PackageDescription="TO, Flat Index; 3 In-Line, Axial Leads; Body Dia. 4.8mm; Leads 0.55 x 0.51 mm (max)", PackageReference=TO-226-AA, Published=8-Jun-2000, Publisher="Altium Limited"
R1 R2 R3 R4 R5 R8 R9 R12 R13 R14 R16 R17 R18 R19 R20 R21 R22 R23 R24 R25 R26 R27 R28 R29 R30 R31 R32 R33 R34 R35 R36 R37 R38 R39 R40 R41 R42 R43 R44 R45 R46 R47 R48 R49 R50 R51 R52 R53 R54 R55 R56 R57 R58 R59 R60 R61 R62 R63 R64 R65 R66 R67 R68 R69 R70: "Resistor", LatestRevisionDate=17-Jul-2002, LatestRevisionNote="Re-released for DXP Platform.", PackageDescription="Axial Device, Thru-Hole; 2 Leads; 0.3 in Pin Spacing", PackageReference=AXIAL-0.3, Published=8-Jun-2000, Publisher="Altium Limited"
S1 S2 S3 S4 S5 S6 S7 S8 S9 S10 S11 S12 S13 S14 S15 S16 S17 S18 S19 S20 S21 S22 S23 S24 S25 S26 S27 S28 S29 S30 S31 S32 S33 S34 S35: "Switch", LatestRevisionDate=17-Jul-2002, LatestRevisionNote="Re-released for DXP Platform.", PackageDescription="Switch; 2 Leads", PackageReference=SPST-2, Published=24-Mar-1999, Publisher="Altium Limited"
U3: "Low-Power, Slew-Rate-Limited RS-485/RS-422 Transceiver", Code_IPC=SOIC127P600-8, Code_JEDEC=MS-012-AA, ComponentLink1Description="Manufacturer Link", ComponentLink1URL=http://www.maxim-ic.com/, ComponentLink2Description=Datasheet, ComponentLink2URL=http://pdfserv.maxim-ic.com/en/ds/MAX1487-MAX491.pdf, DatasheetVersion=Feb-1996, LatestRevisionDate=13-Apr-2006, LatestRevisionNote="IPC-7351 Footprint Added.", PackageDescription="8-Pin Small Outline Integrated Circuit 1.27 mm Pitch", PackageReference=NSO8, Published=16-Jan-2001, Publisher="Altium Limited"
U7: "8-Bit AVR Microcontroller with 16K Bytes of In-System Programmable Flash Memory", ComponentLink1Description="Manufacturer Link", ComponentLink1URL=http://www.atmel.com, ComponentLink2Description=Datasheet, ComponentLink2URL=http://www.atmel.com/dyn/resources/prod_documents/doc2466.pdf, DatasheetVersion=2466E-AVR-10/02, LatestRevisionDate=13-Apr-2006, LatestRevisionNote="IPC-7351 Footprint Added.", PackageDescription="44-Pin Thin Quad Flat Pack 0.8 mm Pitch", PackageReference=44A, PackageVersion="rev.B, Oct-2001", Published=17-Sep-2003, Publisher="Altium Limited"
U8: "SIMPLE SWITCHER Power Converter 150 KHz 3A Step-Down Voltage Regulator", DigiKeyPartNumber=LM2596S-5.0-ND, Manufacturer="National Semiconductor", PackageTopMarking="NSUZXYTT*LM2596S*-5.0 P+", PowerWise=N, Code_JEDEC=MO-169-AB, ComponentLink1Description="LM2596 Datasheet", ComponentLink1URL=http://www.national.com/ds/LM/LM2596.pdf, ComponentLink2Description="LM2596 Web Page", ComponentLink2URL=http://www.national.com/pf/LM/LM2596.html, ComponentLink3Description="TS5B Package Page", ComponentLink3URL=http://www.national.com/packaging/folders/ts5b.html, CompType=Switcher, DatasheetVersion=May-2002, FirstPublished=4-Dec-2008, PackageDescription="TO-263, Molded, .400 x .390 x .180in, 5 Lead, .067in Pitch, Surface Mount", PackageReference=TS5B, PackageVersion="revD, Apr-2005", PartNumber=LM2596S-5.0, PinCount=5, Publisher="Altium Limited", RoHS=O
U9: "Stand-Alone Ethernet Controller with SPI Interface, 28-Pin SOIC", Supplier Part Number 1=ENC28J60/SO-ND, Code_JEDEC=MS-013, ComponentLink1Description=Datasheet, ComponentLink1URL=http://ww1.microchip.com/downloads/en/DeviceDoc/39662c.pdf, ComponentLink2Description="Packaging Specification", ComponentLink2URL=http://www.microchip.com/stellent/groups/techpub_sg/documents/packagingspec/en012702.pdf, ComponentLink3Description="Microchip.com Home", ComponentLink3URL=http://www.microchip.com/, DatasheetVersion="RevC, Jan-2008", FirstPublished=29-Jan-2009, PackageDescription="28-Lead Plastic Small Outline (SO) - Wide 7.50mm Body [SOIC]", PackageReference=SOIC-SO28, PackageVersion="revBB, Aug-2009", Publisher="Altium Limited", Supplier 1=Digi-Key, Supplier 2=Farnell, Supplier 3=Newark, Supplier Part Number 2=1084618, Supplier Part Number 3=96K3660
U10: "800mA and 1A Low Dropout Positive Regulator 2.85V, 3.3V, 5V, and Adjustable", ComponentLink1Description="Manufacturer Link", ComponentLink1URL=http://www.ti.com/, ComponentLink2Description=Datasheet, ComponentLink2URL=http://www-s.ti.com/sc/ds/REG1117.pdf, DatasheetVersion=Sep-1997, LatestRevisionDate=17-Jul-2002, LatestRevisionNote="Re-released for DXP Platform.", PackageDescription="SOT-223/SC-73; 4 Leads; Body 6.7 x 7.3 mm, inc. leads (LxW max)", PackageReference=ZZ311, PackageVersion=revC, Published=8-Jun-2000, Publisher="Altium Limited"
Y1: library part XTAL, "Crystal Oscillator", LatestRevisionDate=17-Jul-2002, LatestRevisionNote="Re-released for DXP Platform.", PackageDescription="Crystal, Thru-Hole; 2 Leads; Body 3.1 x 8.2 mm (Dia.xH)", PackageReference=R38, Published=8-Jun-2000, Publisher="Altium Limited"
Y2: "Crystal Oscillator", LatestRevisionDate=17-Jul-2002, LatestRevisionNote="Re-released for DXP Platform.", PackageDescription="Crystal, Thru-Hole; 2 Leads; Body 3.1 x 8.2 mm (Dia.xH)", PackageReference=R38, Published=8-Jun-2000, Publisher="Altium Limited"

## Via types
v1: diameter 0.6, hole 0.3, Top Layer to Bottom Layer, 266 vias
v2: diameter 0.9, hole 0.9, Top Layer to Bottom Layer, 35 vias

## Nets (pads, with @x,y where several pads share a name; then routed paths per layer and width w, separated by ;. In a path a pad name is that pad's centre, name@x,y a point inside that pad or via, vN(x,y) a via of type N, cw(c..) or ccw(c..) an arc to the next point about the centre after c; other vN are vias at no path point)
+3.3V: C38.1 C39.2 C40.2 C41.2 C42.1 C43.2 C50.1 C51.1 L3.2 R56.2 R61.2 U9.15 U9.19 U9.20 U9.25 U9.28 U10.2 U10.4 | length 134.9
  Top Layer w0.5: v1(76.581,104.775) 76.581,104.394 77.216,103.759 84.201,103.759 85.09,102.87 v1(85.09,99.822) ; v1(85.217,97.155) 85.217,90.17 86.106,89.281 v1(90.932,89.281) 93.091,87.122 93.091,83.502 91.821,82.232 91.821,70.739 91.186,70.104 v1@91.059,69.977 ; v1(91.186,112.903) 90.424,112.903 89.535,112.014 89.535,105.664 ; v1(93.726,104.94) 90.259,104.94 89.535,105.664 ; C42.1@95.25,95.758 95.25,98.552 94.869,98.933 90.043,98.933 89.535,99.441 89.535,105.664
  Top Layer w1: v1@91.186,70.104 v1(91.313,70.104)
  Bottom Layer w0.5: v1(85.09,99.822) 85.217,99.695 v1(85.217,97.155) ; L3.2@90.043,116.078 90.336,115.785 91.186,115.785 v1(91.186,112.903) 91.186,111.655 U9.15@91.164,111.633 ; v1(90.932,89.281) 91.164,89.513 U9.28@91.164,95.123 99.253,95.123 99.672,95.542 C43.2@99.822,95.542 ; U9.25@91.164,98.933 94.869,98.933 95.377,98.425 95.377,95.885 C42.1@95.25,95.758 ; U9.19@91.164,106.553 U9.20@91.164,105.283 94.846,105.283 95.227,104.902 C39.2@95.377,104.902 98.298,104.902 98.806,105.41 98.806,107.442 99.245,107.881 100.261,107.881 C38.1@100.457,108.077
  Bottom Layer w1: v1(76.581,104.775) R61.2@76.581,106.68 ; U10.4@82.604,69.596 83.947,69.596 84.455,70.104 ; C51.1@85.09,75.692 85.09,70.739 84.455,70.104 ; C50.1@91.059,69.977 C50.1@91.186,70.104 ; v1(91.313,70.104) C50.1@91.186,70.104 ; 84.455,70.104 C50.1@91.186,70.104
+24V: C24.1 C28.1 C29.1 C30.1 C31.1 D6.2 D7.2 U8.1 | length 39.2
  Bottom Layer w1: C28.1@166.624,79.883 170.49,79.883 170.561,79.954 ; U8.1@170.971,65.33 170.946,65.355 170.946,68.322 170.561,68.707 170.561,75.639 ; C30.1@171.069,83.82 171.069,83.67 171.031,83.632 171.031,81.892 170.561,81.422 170.561,79.954 ; D6.2@181.102,77.724 176.022,77.724 175.26,76.962 175.26,74.041 174.244,73.025 171.274,73.025 170.688,73.611 170.688,75.512 170.561,75.639 ; 170.561,75.639 C31.1@170.561,78.486 170.561,79.954
A485: P1.1 R12.1 R14.2 U3.6 | length 17.1
  Top Layer w0.3: v1(197.696,47.879) v1(197.696,52.832)
  Bottom Layer w0.3: U3.6@191.897,51.168 191.897,52.832 192.405,53.34 194.437,53.34 194.945,52.832 197.612,52.832 P1.1@199.898,52.832 ; R14.2@196.469,47.879 197.612,47.879 R12.1@198.501,47.879
B485: P1.2 R13.2 R14.1 U3.7 | length 22.4
  Bottom Layer w0.3: R13.2@188.722,49.149 189.103,49.53 193.04,49.53 ; U3.7@193.167,51.168 193.167,49.657 193.04,49.53 ; P1.2@199.898,55.372 201.676,55.372 201.802,55.246 202.184,54.864 202.184,51.689 201.676,51.181 197.104,51.181 196.469,50.546 R14.1@196.469,49.657 194.847,49.657 194.72,49.53 193.04,49.53
buzz: R37.1 U7.24 | length 103.3
  Top Layer w0.3: v1(59.436,43.688) 59.436,41.148 v1(59.69,40.894) ; v1(120.777,38.481) v1(120.777,66.294)
  Bottom Layer w0.3: R37.1@57.785,43.688 v1(59.436,43.688) ; v1(59.69,40.894) 70.993,40.894 71.247,41.148 114.681,41.148 115.062,40.767 115.062,38.862 115.443,38.481 v1(120.777,38.481) ; U7.24@119.024,72.582 119.024,70.689 119.482,70.231 120.382,70.231 120.777,69.836 v1(120.777,66.294)
Com_Led: R68.1 U7.30 | length 158
  Top Layer w0.3: v1(114.808,68.072) 114.808,30.48 115.316,29.972 207.899,29.972 208.661,30.734 208.661,42.177 v1(209.41,42.926)
  Bottom Layer w0.3: U7.30@114.224,72.582 114.224,68.656 v1(114.808,68.072) ; v1(209.41,42.926) 212.471,42.926 212.979,43.434 R68.1@212.979,48.387
CS: R55.2 U7.44 | length 28.9
  Bottom Layer w0.3: R55.2@89.916,91.313 89.916,83.058 90.742,82.232 U7.44@110.174,82.232
ENC1: C45.2 L3.1 NET.1 R66.1 R67.1 | length 16.9
  Bottom Layer w0.5: NET.1@96.139,122.936 95.639,122.436 95.639,121.793 95.543,121.697 L3.1@95.543,116.078 95.758,115.863 95.758,112.903 96.647,112.014 R66.1@96.647,110.617 96.603,110.573 96.603,106.852 C45.2@96.558,106.807
ENC8: NET.6 R63.1 | length 2.6
  Bottom Layer w0.381: R63.1@83.312,120.396 83.439,120.523 NET.6@83.439,122.936
ENC10: NET.7 R62.1 | length 2.5
  Bottom Layer w0.381: R62.1@80.899,120.396 NET.7@80.899,122.936
GND: C3.2 C5.2 C13.2 C14.1 C15.1 C18.1 C19.1 C20.1 C21.1 C22.1 C23.1 C24.2 C25.2 C26.2 C27.2 C28.2 C29.2 C30.2 C31.2 C32.2 C33.2 C34.2 C37.2 C38.2 C39.1 C40.1 C41.1 C42.2 C43.1 C44.1 C45.1 C46.1 C47.1 C48.2 C49.2 C50.2 C51.2 Cx1.2 Cx2.1 Cx3.2 Cx4.1 D1.2 D2.2 D3.2 D4.1 D5.1 D8.2 D9.2 D10.2 D11.2 D12.2 D13.2 D14.2 D15.2 D16.2 D17.2 D18.2 D19.2 D20.2 D21.2 D22.2 D23.2 D24.1 D25.2 D26.1 D27.1 D28.1 D29.1 D30.1 D31.1 D32.1 D33.1 D34.1 D35.1 D36.1 D37.1 D38.1 D39.1 D40.1 D41.1 NET.8 P1.3 P2.3 Q1.3 Q2.3 R1.1 R2.1 R3.1 R4.1 R5.1 R13.1 R38.1 R60.2 R69.1 U3.5 U7.6 U7.18 U7.28 U7.39 U8.3 U8.5 U9.2 U9.11 U9.18 U9.21 U9.22 U10.1 UX1.2 UX1.3 UX1.12 UX1.21 UX2.2 UX2.3 UX2.12 UX2.21 | length 1672.2
  Top Layer w0.4: v1(35.814,75.311) 35.941,75.438 D26.1@41.275,75.438 ; v1(41.021,48.411) 41.021,49.657 D27.1@41.275,49.911 ; D34.1@71.247,100.203 71.247,98.479 71.628,98.098 v1(71.628,98.044) ; D14.2@131.318,150.495 v1(131.318,152.781) ; v1(143.764,53.975) 143.764,53.086 144.526,52.324 148.082,52.324 ; v1(146.558,120.269) 149.046,120.269 ; v1(147.701,61.722) 147.701,52.705 148.082,52.324 ; v1(148.971,130.937) 149.046,130.862 149.046,120.269 ; v1(150.495,120.269) 149.046,120.269 ; v1(151.511,42.164) 151.452,42.223 151.452,52.324 ; v1(152.096,52.324) 151.452,52.324 ; D15.2@161.29,150.622 v1(161.29,152.908) ; 162.272,123.224 162.433,123.063 ; v1(191.262,152.908) 191.262,150.749 D8.2@191.516,150.495 ; D16.2@221.488,100.203 221.488,98.552 221.869,98.171 222.123,97.917 v1(237.744,97.917) ; D9.2@221.615,150.495 v1(221.615,153.035) ; 221.742,74.422 221.742,73.152 222.377,72.517 v1(237.49,72.517) ; 148.082,52.324 151.452,52.324
  Top Layer w0.5: D26.1@41.275,75.438 41.275,73.66 41.91,73.025 60.198,73.025 60.706,73.533 v1(61.087,73.533) ; v1(66.421,73.533) 70.739,73.533 ; D36.1@71.374,75.438 71.374,74.168 70.739,73.533 ; C37.2@77.724,98.552 86.233,98.552 86.487,98.806 ; v1(87.73,73.67) 87.594,73.533 70.739,73.533 ; v1(109.347,94.615) 116.713,94.615 117.787,95.689 117.787,96.959 C13.2@117.983,97.155 C13.2@118.179,96.959 ; v1(133.35,77.178) 133.604,76.924 D38.1@133.604,75.438 ; D18.2@161.163,100.203 161.417,99.949 161.417,99.06 161.925,98.552 174.879,98.552 175.514,99.187 179.959,99.187 ; v1(179.324,100.457) 179.324,99.822 179.959,99.187 ; v1(184.658,75.692) 184.658,73.787 185.039,73.406 190.627,73.406 191.143,73.922 191.143,74.938 D40.1@191.643,75.438 ; v1(190.246,50.927) 190.573,50.927 191.389,50.111 D32.1@191.389,49.911 ; D17.2@191.643,100.203 183.007,100.203 181.991,99.187 ; v1(195.58,98.425) 190.881,98.425 190.119,99.187 181.991,99.187 ; v1(219.456,98.171) 221.869,98.171 ; 179.959,99.187 181.991,99.187
  Top Layer w0.8: v1(41.275,125.349) 41.625,124.999 41.625,123.983 42.164,123.444 v1(60.96,123.444) ; v1(66.167,123.444) 71.501,123.444 ; v1(70.104,48.26) 70.104,48.314 71.501,49.711 D28.1@71.501,49.911 ; v1(71.374,125.349) 71.374,123.571 71.501,123.444 ; v1(86.233,107.823) 86.487,107.569 86.487,98.806 86.487,93.853 87.122,93.218 C42.2@95.25,93.218 ; v1(96.266,125.222) 77.597,125.222 75.311,122.936 72.009,122.936 71.501,123.444 ; v1(99.314,49.657) 99.568,49.911 D29.1@101.092,49.911 ; v1(101.473,125.349) 101.823,124.999 101.823,123.729 102.362,123.19 107.569,123.19 109.728,125.349 v1(121.539,125.349) ; D37.1@103.632,75.438 v1(103.632,79.032) ; v1(116.249,80.208) 116.249,80.373 116.718,80.842 160.712,80.842 161.671,79.883 D39.1@161.671,75.438 ; v1(127,125.349) D13.2@131.445,125.349 ; v1(133.477,48.133) 133.477,49.784 D30.1@133.604,49.911 ; v1(158.721,123.224) 158.882,123.063 162.433,123.063 190.373,123.063 ; v1(159.258,47.371) 159.258,49.276 159.893,49.911 D31.1@161.544,49.911 161.544,52.236 162.013,52.705 169.037,52.705 169.545,52.197 169.545,51.534 169.533,51.522 169.533,49.772 D24.1@169.418,49.657 ; D12.2@161.671,125.349 161.671,123.825 162.272,123.224 ; D10.2@191.389,125.349 191.039,124.999 191.039,123.729 190.373,123.063 ; v1(195.707,123.063) 190.373,123.063 ; D11.2@221.319,124.799 221.519,124.799 221.869,125.149 D11.2@221.869,125.349 222.219,124.999 222.219,123.475 v1(222.758,122.936) v1(237.617,122.936)
  Top Layer w1: v1(39.878,100.076) 41.148,100.076 D35.1@41.275,100.203 ; D1.2@41.402,150.495 v1(41.402,152.908) ; D3.2@71.628,150.495 v1(71.628,152.781) ; v1(101.981,152.781) 101.981,150.622 D2.2@102.108,150.495 ; D39.1@161.671,75.438 161.921,75.188 161.921,73.738 162.507,73.152 166.038,73.152 166.624,73.738 C28.2@166.624,77.343 ; v1(224.028,49.911) 224.278,49.661 224.278,48.211 224.864,47.625 228.6,47.625 229.362,48.387 D25.2@229.362,49.711 ; D25.2@229.362,49.911 D25.2@229.362,49.711 ; v1(237.49,49.403) 229.87,49.403 229.812,49.461 229.612,49.461 D25.2@229.362,49.711
  Bottom Layer w0.3: v1(143.764,53.975) 143.764,53.894 143.846,53.812 UX1.12@143.846,52.324 ; UX2.21@149.046,129.171 149.046,133.171 149.86,133.985 158.369,133.985 158.877,133.477 Cx3.2@158.877,131.953 158.877,131.622 158.496,131.241 158.496,131.064 157.772,130.34 Cx4.1@153.416,130.34
  Bottom Layer w0.4: 26.162,75.311 v1(35.814,75.311) ; v1(39.878,100.076) 39.878,98.933 40.513,98.298 72.009,98.298 72.263,98.552 C37.2@77.724,98.552 79.883,96.393 U9.2@82.064,96.393 ; 40.767,43.434 40.767,48.177 ; Q1.3@53.66,45.593 53.66,43.622 R38.1@53.848,43.434 ; UX2.12@143.846,122.047 143.846,120.695 144.272,120.269 v1(146.558,120.269) ; Cx2.1@147.993,67.31 148.101,67.202 148.101,63.608 Cx1.2@148.209,63.5 148.063,63.354 148.063,62.138 147.701,61.776 v1(147.701,61.722) 148.717,61.722 149.046,61.393 UX1.21@149.046,59.448 ; UX1.3@149.696,52.324 149.855,52.324 150.089,52.09 150.089,51.475 150.495,51.069 151.526,51.069 152.058,51.601 152.058,52.286 v1(152.096,52.324) ; UX2.3@149.696,122.047 149.88,122.047 149.987,121.94 149.987,120.777 v1(150.495,120.269) 153.797,120.269 154.178,120.65 154.178,122.555 154.847,123.224 v1(158.721,123.224)
  Bottom Layer w0.5: v1(61.087,73.533) v1(66.421,73.533) ; U9.11@82.064,107.823 v1(86.233,107.823) 89.027,107.823 ; C51.2@87.63,75.692 C51.2@87.73,75.592 ; 89.916,104.14 89.027,105.029 89.027,107.823 ; C45.1@94.958,106.807 93.853,106.807 92.837,107.823 U9.18@91.164,107.823 89.027,107.823 ; C25.2@98.298,79.248 98.387,79.159 106.134,79.159 107.061,78.232 U7.39@110.174,78.232 115.849,78.232 ; 100.276,103.705 100.457,103.886 C38.2@100.457,105.537 ; 101.727,94.511 101.831,94.615 v1(109.347,94.615) ; U7.28@115.824,72.582 115.849,72.607 115.849,74.904 115.874,74.929 115.874,77.225 115.849,77.25 115.849,77.343 ; U7.6@115.824,83.882 115.824,81.813 115.879,81.758 115.879,79.073 115.849,79.042 115.849,78.232 ; C13.2@117.983,97.155 117.983,96.878 117.386,96.281 C14.1@117.386,93.599 117.405,93.618 118.98,93.618 C23.1@118.999,93.637 118.999,95.123 C32.2@120.142,95.123 120.161,95.104 123.933,95.104 C33.2@123.952,95.085 126.962,95.085 127.635,95.758 127.635,99.949 128.143,100.457 131.064,100.457 v1(131.318,100.203) ; 120.507,77.432 115.938,77.432 115.849,77.343 ; U7.18@121.474,77.432 127.11,77.432 128.088,76.454 C26.2@128.27,76.454 128.547,76.454 129.271,77.178 C21.1@131.826,77.178 v1(133.35,77.178) ; C22.1@121.666,93.675 121.856,93.865 C15.1@121.856,94.895 ; D24.1@169.418,49.657 169.533,49.772 169.533,50.647 170.066,51.18 170.941,51.18 ; 183.007,75.819 183.134,75.692 v1(184.658,75.692) ; R13.1@188.722,50.927 v1(190.246,50.927) 190.581,50.927 190.627,50.973 U3.5@190.627,51.168 190.627,55.245 191.897,56.515 191.897,58.839 C5.2@191.986,58.928 192.024,58.966 192.024,60.579 192.659,61.214 194.564,61.214 195.326,60.452 195.326,58.42 195.834,57.912 P1.3@199.898,57.912 ; v1(195.58,98.425) 219.202,98.425 v1(219.456,98.171) ; 115.849,77.343 115.849,78.232
  Bottom Layer w0.8: R38.1@53.34,43.434 53.34,42.037 54.356,41.021 57.023,41.021 58.039,42.037 69.977,42.037 ; v1(60.96,123.444) v1(66.167,123.444) ; v1(70.104,48.26) 69.977,48.133 69.977,42.037 ; v1(71.374,125.349) 71.374,123.571 71.628,123.317 72.009,122.936 NET.8@78.359,122.936 78.359,115.062 76.781,113.484 76.781,112.976 R60.2@76.581,112.776 ; 91.164,103.378 91.291,103.505 100.476,103.505 ; C42.2@95.25,93.218 95.446,93.218 96.17,93.942 C43.1@99.822,93.942 99.922,94.042 101.258,94.042 101.727,94.511 101.727,98.845 101.6,98.972 ; v1(96.266,125.222) 101.346,125.222 v1(101.473,125.349) ; v1(99.314,49.657) 98.933,49.276 98.933,42.037 ; C38.2@100.457,105.537 100.476,105.518 100.476,103.505 ; v1(101.6,99.822) 101.6,98.972 ; v1(121.539,125.349) v1(127,125.349) ; v1(133.477,48.133) 133.477,43.18 134.62,42.037 ; v1(159.258,47.371) 159.258,42.672 158.623,42.037 134.62,42.037 ; 179.705,52.324 187.325,52.324 R13.1@188.722,50.927 ; v1(195.707,123.063) 222.631,123.063 v1(222.758,122.936) ; R5.1@237.109,39.497 237.871,40.259 237.871,100.457 237.744,100.584 ; 69.977,42.037 98.933,42.037 ; 98.933,42.037 134.62,42.037 ; 100.476,103.505 100.476,102 C46.1@100.495,101.981 C47.1@100.495,99.314 100.495,99.164 100.595,99.064 101.508,99.064 101.6,98.972
  Bottom Layer w1: v1(39.878,100.076) 26.162,100.076 ; v1(41.275,125.349) 26.289,125.349 26.162,125.476 ; R38.1@53.848,43.434 53.34,43.434 40.767,43.434 27.94,43.434 26.162,45.212 26.162,75.311 26.162,100.076 ; C44.1@74.676,112.687 74.826,112.687 74.915,112.776 R60.2@76.581,112.776 ; P2.3@80.518,80.391 80.614,80.295 80.614,78.644 81.28,77.978 86.868,77.978 87.53,77.316 87.53,75.792 C51.2@87.63,75.692 ; C27.2@84.328,62.103 91.821,62.103 92.837,63.119 92.837,68.58 ; C51.2@87.73,75.592 v1(87.73,73.67) 87.73,73.433 88.138,73.025 88.138,72.887 89.129,71.896 U10.1@89.354,71.896 92.061,71.896 92.837,71.12 92.837,68.58 ; C49.2@91.313,68.58 92.837,68.58 ; C28.2@166.497,77.216 C28.2@166.497,77.366 ; C28.2@166.624,77.343 166.724,77.243 167.64,77.243 168.656,76.227 168.656,62.484 169.545,61.595 174.244,61.595 174.371,61.722 ; 170.941,51.18 171.933,52.172 171.933,57.887 174.371,60.325 174.371,61.595 ; C30.2@172.669,83.82 172.669,83.67 172.631,83.632 C29.2@172.631,82.042 172.631,81.892 172.951,81.572 173.101,81.572 173.101,80.264 ; C24.2@172.72,75.08 173.101,75.461 C31.2@173.101,78.486 173.101,80.264 ; U8.5@177.771,65.33 177.771,62.455 176.911,61.595 174.371,61.595 ; D4.1@178.054,100.457 v1(179.324,100.457) D5.1@181.102,100.457 ; P1.3@199.898,57.912 222.504,57.912 224.028,56.388 224.028,51.992 ; R69.1@215.138,52.07 215.238,52.17 215.438,52.17 215.526,52.258 Q2.3@217.17,52.258 217.17,52.283 217.295,52.408 217.32,52.408 217.49,52.578 223.442,52.578 224.028,51.992 ; v1(224.028,49.911) 224.028,51.992 ; 237.744,100.584 237.744,151.384 236.093,153.035 v1(221.615,153.035) 27.813,153.035 26.162,151.384 26.162,125.476 ; 26.162,100.076 26.162,125.476 ; 173.101,80.264 173.355,80.518 182.626,80.518 183.515,79.629 183.515,76.327 183.007,75.819 182.499,75.311 177.243,75.311 176.657,74.725 176.657,73.279 174.371,70.993 U8.3@174.371,65.33 174.371,61.722 ; 174.371,61.595 174.371,61.722
in1: R1.2 S1.1 S2.1 S7.1 S12.1 S21.1 S26.1 S31.1 U7.12 | length 318.5
  Top Layer w0.3: 78.282,140.081 79.121,140.081 ; v1(128.397,103.759) 128.397,99.187 v1(128.524,99.06) ; 138.43,140.081 138.557,140.208 139.573,140.208
  Top Layer w0.5: 48.26,140.081 48.983,140.081 49.276,140.374 49.276,147.32 49.784,147.828 80.61,147.828 ; 79.121,140.081 80.137,141.097 80.137,147.355 80.61,147.828 ; 108.331,140.081 109.22,140.081 110.045,140.906 110.045,147.637 109.855,147.828 ; 139.573,140.208 140.081,140.716 140.081,147.828 ; 168.452,140.081 169.418,140.081 170.434,141.097 170.434,146.812 169.418,147.828 ; 198.628,140.081 199.771,141.224 199.771,146.558 198.501,147.828 ; 228.65,140.081 228.777,139.954 v1(228.981,139.954) 229.87,139.954 230.378,140.462 230.378,146.812 229.362,147.828 198.501,147.828 ; 80.61,147.828 109.855,147.828 ; 109.855,147.828 140.081,147.828 ; 140.081,147.828 169.418,147.828 ; 169.418,147.828 198.501,147.828
  Bottom Layer w0.3: U7.12@121.474,82.232 124.523,82.232 125.095,82.804 128.051,82.804 128.559,83.312 v1@128.559,99.06 ; v1(128.397,103.759) 128.397,139.446 129.032,140.081 v2(132.588,140.081) ; v1(228.981,139.954) 235.204,139.954 R1.2@235.458,140.208
  other v2: 42.418,140.081 72.44,140.081 102.489,140.081 162.61,140.081 192.786,140.081 222.808,140.081